# Altium PCB uMote_.PcbDoc
Units mm, origin at the board's own origin, x right, y up, seen from the top; angles counter-clockwise.
Board outline 73.42 x 46.3 mm, 2 copper layers (Top Layer, Bottom Layer); 33 components, 38 nets, 156 pads, 17 vias.
Unrouted connection lines stored in the file: 36.
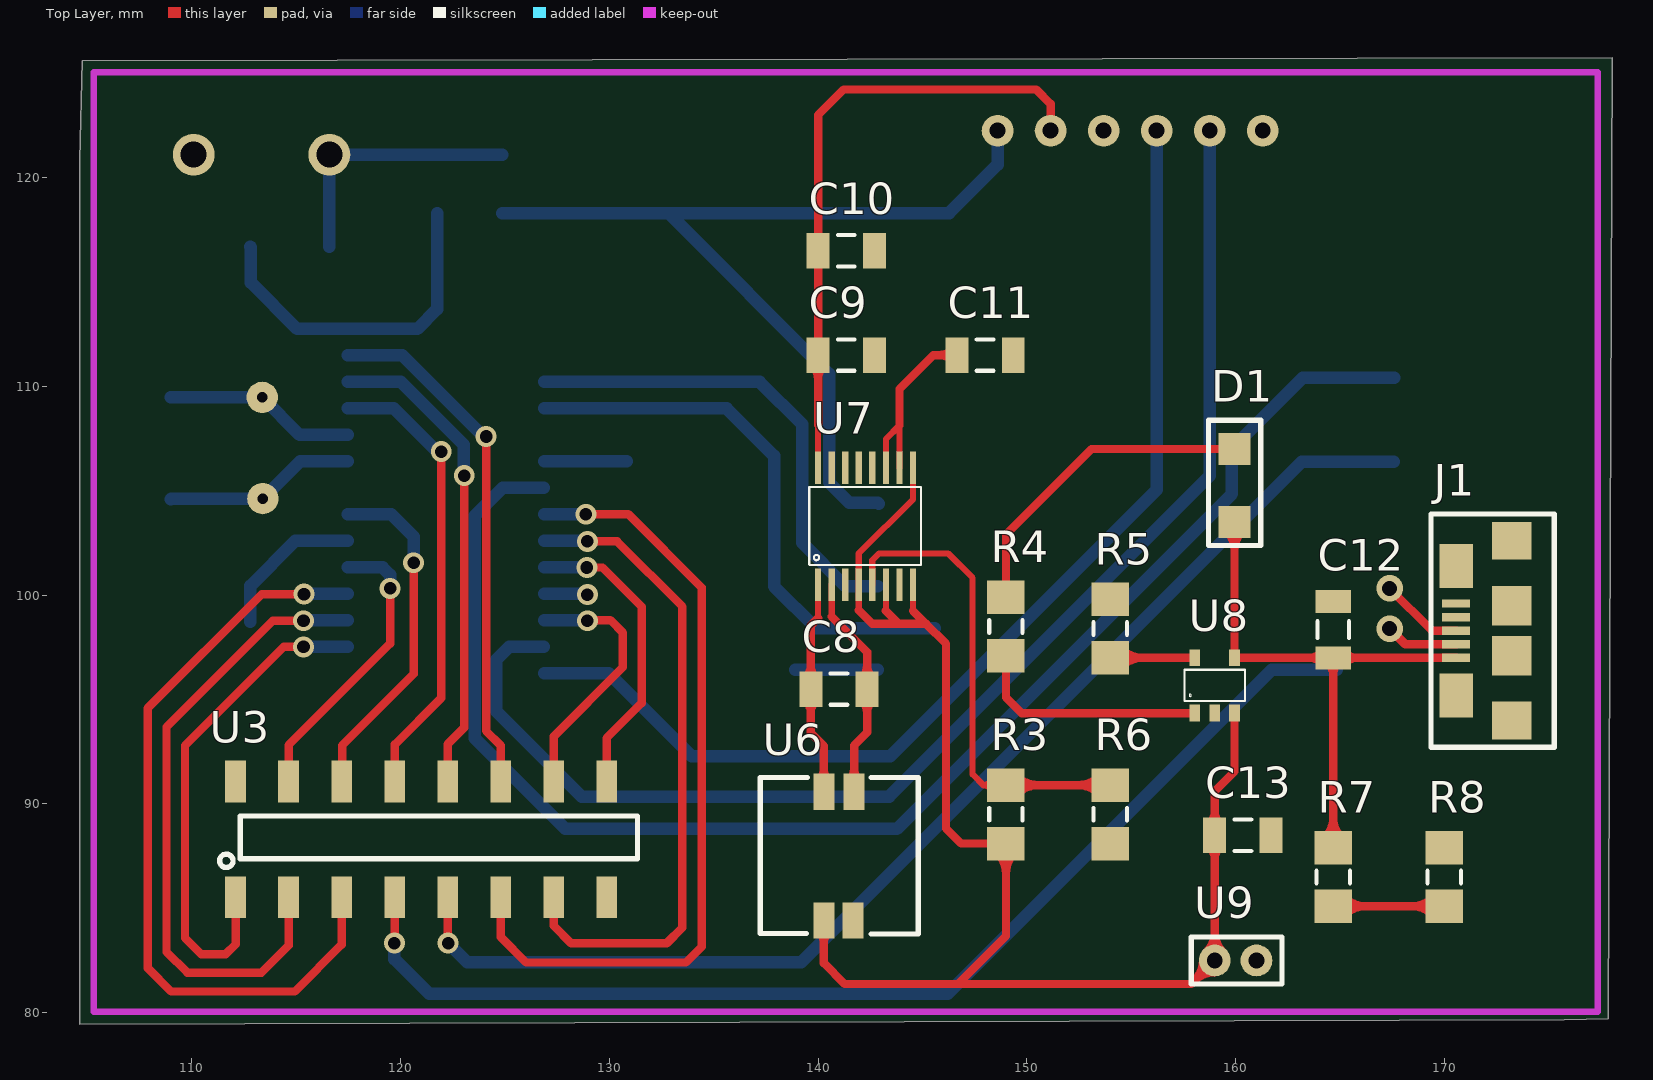
[diagram p0: Top Layer view]
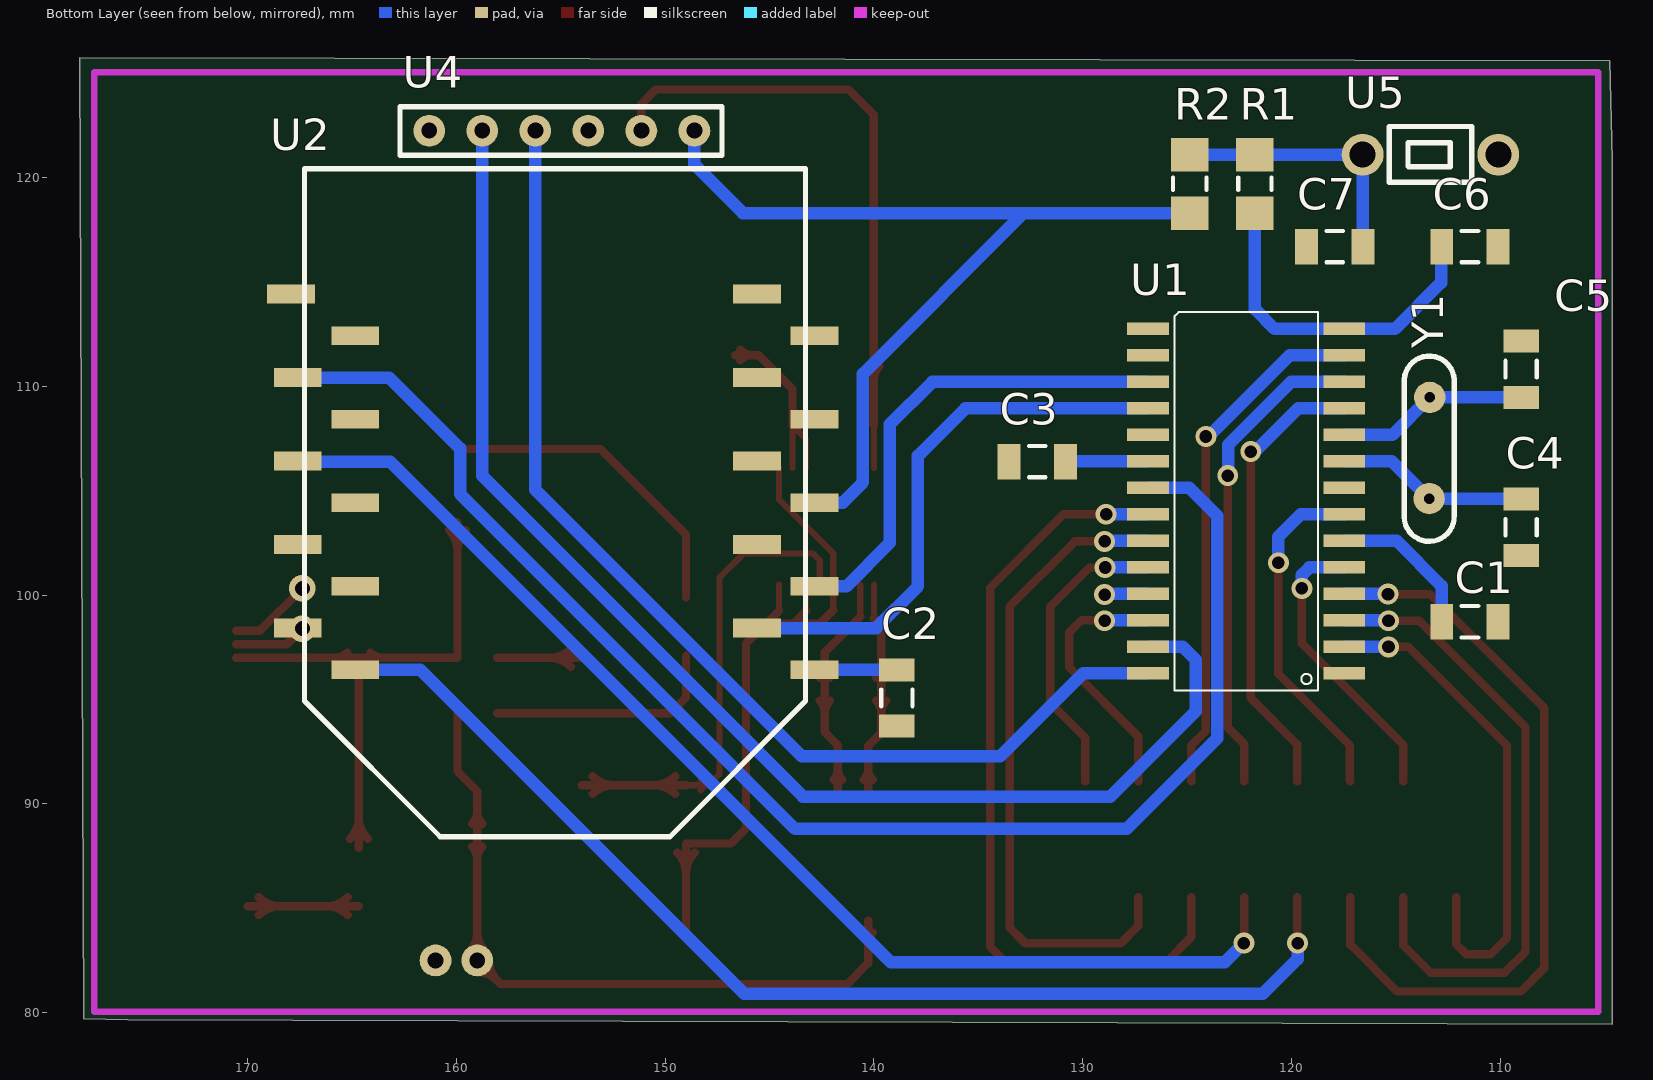
[diagram p1: Bottom Layer view, seen from below]

## Layer stack, top to bottom
Top Layer: signal copper 0.0356
Dielectric: core 0.32, FR-4, Dk 4.8
Bottom Layer: signal copper 0.0356

## Board outline
104.625,120.85 104.75,125.6 178.05,125.75 177.85,79.7 175.75,79.65 104.625,79.45

## Design rules (kind name [scope] priority, off if disabled: settings)
Clearance [All] p1: gap=0.2
PolygonConnect [All] p1: connectstyle=Relief reliefconductorwidth=0.254 reliefentries=4 polygonreliefangle="90 Angle"
RoomDefinition pic [InComponentClass('pic')] p1: confinementstyle=ConfineIn formatcopy=TRUE lockcomponents=FALSE outline 106.525,79.875 170.225,79.875 170.225,124.85 106.525,124.85
RoomDefinition power [InComponentClass('power')] p2: confinementstyle=ConfineIn formatcopy=TRUE lockcomponents=FALSE outline 135.5,80 176,80 175.877,110.754 155.849,110.754 155.824,120.475 135.5,120.399
RoutingVias [All] p1: holewidth=0.6 width=1 viastyle="Through Hole" minholewidth=0.711 minwidth=1 maxholewidth=0.711 maxwidth=1
SilkscreenOverComponentPads [All] p1: minsilkscreentomaskgap=0.254
SolderMaskExpansion [All] p1: expansion=0.102
Width [All] p1: maxlimit=0.6 minlimit=0.2 preferedwidth=0.6 toplayer_maxwidth=0.4 toplayer_prefwidth=0.4 minimp=50.000000 maximp=50.000000 favimp=50.000000
27 further rules are at their usual default settings.

## Classes and differential pairs
component class pic: C1 C2 C3 C4 C5 C6 C7 R1 R2 U1 U2 U3 U4 U5 Y1
component class power: C8 C9 C10 C11 C12 C13 D1 J1 R3 R4 R5 R6 R7 R8 U6 U7 U8 U9

## Components (designator, comment, footprint, x,y, rotation, side; value= is the part's Value field where it differs from the comment)
C1 "10uF 10V" C1206 111.45,98.725 r0 bottom
C2 "TDK" C1206 138.9,95.075 r270 bottom
C3 "0.1uF 20V" C1206 132.175,106.4 r0 bottom
C4 "22pF" C1206 109,103.25 r270 bottom
C5 "22pF" C1206 109,110.825 r90 bottom
C6 "0.1uF" C1206 111.45,116.7 r180 bottom
C7 "0.1uF 20V" C1206 117.925,116.7 r0 bottom
C8 "10uF" C1206 141,95.5 r0 top
C9 "2.2uF" C1206 141.35,111.5 r0 top
C10 "100uF" C1206 141.35,116.5 r0 top
C11 "2.2uF" C1206 148,111.5 r180 top
C12 "4.7uF" C1206 164.675,98.35 r90 top
C13 "4.7uF" C1206 160.35,88.5 r0 top
D1 "LED2" "LED SMD 1206" 159.95,103.5 r90 top
J1 "MicroUSB-B" "Micro USB Tipo B" 170.561,98.297 r90 top
R1 "15K" 3216[1206] 121.75,119.7 r90 bottom
R2 "820" 3216[1206] 124.875,119.7 r270 bottom
R3 "1.3K" 3216[1206] 149,89.5 r270 top
R4 "330" 3216[1206] 149,98.5 r270 top
R5 "2K" 3216[1206] 154,98.4 r270 top
R6 "500K" 3216[1206] 154,89.5 r90 top
R7 "56K" 3216[1206] 164.675,86.5 r90 top
R8 "100K" 3216[1206] 170,86.5 r270 top
U1 "PIC18F26J50" PIC18F-SOIC 122.175,104.505 r0 bottom
U2 "XBee PRO" "XBEE PRO SMD" 155.387,105.425 r0 bottom
U3 "14 PIN DUAL HEADER SMD" "14 PIN DUAL HEADER" 112.1,85.525 r0 top
U4 "PicKit2" PICKIT3 148.6,122.25 r0 bottom
U5 "Mini Switch" "Mini Switch" 116.59,125.6 r180 bottom
U6 "COILTRONICS DRQ74-220" DRQ-220 141,87.5 r90 top
U7 "TPS61131" TPS61131 140,100.5 r0 top
U8 "MCP73831/2" MCP73831 159,95.675 r0 top
U9 "Battery" "JST PH" 159,82.5 r0 top
Y1 "XTAL" HC-49/US 113.4,104.625 r90 bottom

## Footprints (in the part's own frame and the unit in brackets; to place one, negate y for a bottom-side part, rotate by r counter-clockwise, add the part's x,y. Pads: shape width x height; smd on the part's side, far side on the other; paste and mask are expansions set on the pad)
"14 PIN DUAL HEADER" [mm]
  rect 1x2 smd: 1(0,0) 2(2.54,0) 3(5.08,0) 4(7.62,0) 5(10.16,0) 6(12.7,0) 7(15.24,0) 8(17.775,0) 9(17.775,5.55) 10(15.24,5.55) 11(12.7,5.55) 12(10.16,5.55) 13(7.62,5.55) 14(5.08,5.55) 15(2.54,5.55) 16(0,5.55)
  silkscreen extent -0.76,1.43 19.25,3.9, body extent -1.38,0 19.5,5.53, height 2
3216[1206] [mm] "Chip Resistor; Body 3.2 x 1.6 mm (LxW typ)"
  rect 1.6x1.8 smd: 1(-1.4,0) 2(1.4,0)
  silkscreen extent -0.3,-0.8 0.3,0.8
C1206 [mm] "Chip Capacitor, Body 3.2x1.6mm, IPC High Density"
  rect 1.1x1.7 smd: 1(-1.35,0) 2(1.35,0)
  silkscreen extent -0.4,-0.75 0.4,0.75, body extent -1.7,-0.9 1.7,0.9, height 1.3
DRQ-220 [mm]
  rect 1.73x1 smd: 1(-3.085,0.725) 2(-3.085,-0.675) 3(3.085,-0.725) 4(3.085,0.725)
  silkscreen extent -3.74,-3.8 3.76,3.78, body extent -3.51,-3.65 3.54,3.58, height 4.45
HC-49/US [mm]
  round 1.5 hole 0.5: 1(0,0) 2(4.85,-0.025)
  silkscreen extent -2.05,-1.2 6.82,1.2
"JST PH" [mil]
  round 60 hole 30: 1(0,0) 2(78.74,0)
  silkscreen extent -44,-44 127,44
"LED SMD 1206" [mil]
  rect 60x60 smd: 1(0,0) 2(137.8,0)
  silkscreen extent -44,-49 192,49
MCP73831 [mm]
  rect 0.51x0.8 smd: 1(-0.95,-1.325) 2(0,-1.325) 3(0.95,-1.325) 4(0.95,1.325) 5(-0.95,1.325)
  silkscreen extent -1.45,-0.75 1.45,0.75
"Micro USB Tipo B" [mm]
  rect 0.4x1.35 smd: 1(-1.3,0) 2(-0.65,0) 3(0,0) 4(0.65,0) 5(1.3,0)
  rect 1.8x1.9 smd: 6(-4.3,-2.675) 6(4.3,-2.675)
  rect 2.1x1.6 smd: 6(-3.1,0) 6(3.1,0)
  rect 1.9x1.9 smd: 6(-1.2,-2.675) 6(1.2,-2.675)
  silkscreen extent -5.59,-4.7 5.59,1.2
"Mini Switch" [mm]
  round 2 hole 1.24: 1(6.5,-4.5) 2(0,-4.5)
  silkscreen extent 1.28,-5.82 5.23,-3.15, body extent 1.28,-5.8 5.23,-3.17, height 2
PIC18F-SOIC [mm]
  rect 2x0.6 smd: 1(-4.7,8.255) 2(-4.7,6.985) 3(-4.7,5.715) 4(-4.7,4.445) 5(-4.7,3.175) 6(-4.7,1.905) 7(-4.7,0.635) 8(-4.7,-0.635) 9(-4.7,-1.905) 10(-4.7,-3.175) 11(-4.7,-4.445) 12(-4.7,-5.715) 13(-4.7,-6.985) 14(-4.7,-8.255) 15(4.7,-8.255) 16(4.7,-6.985) 17(4.7,-5.715) 18(4.7,-4.445) 19(4.7,-3.175) 20(4.7,-1.905) 21(4.7,-0.635) 22(4.7,0.635) 23(4.7,1.905) 24(4.7,3.175) 25(4.7,4.445) 26(4.7,5.715) 27(4.7,6.985) 28(4.7,8.255)
  silkscreen extent -3.45,-9.05 3.43,9.07
PICKIT3 [mil]
  round 60 hole 30: 1(0,0) 2(100,0) 3(200,0) 4(300,0) 5(400,0) 6(500,0)
  silkscreen extent -52,-45 555,46
TPS61131 [mm]
  rect 0.3x1.55 smd: 1(0,0) 2(0.65,0) 3(1.3,0) 4(1.95,0) 5(2.6,0) 6(3.25,0) 7(3.9,0) 8(4.55,0) 9(4.55,5.6) 10(3.9,5.6) 11(3.25,5.6) 12(2.6,5.6) 13(1.95,5.6) 14(1.3,5.6) 15(0.65,5.6) 16(0,5.6)
  silkscreen extent -0.43,0.95 4.92,4.67
"XBEE PRO SMD" [mm]
  rect 2.29x0.9 smd: 1(-12.537,9) 2(-9.787,7) 3(-12.537,5) 4(-9.787,3) 5(-12.537,1) 6(-9.787,-1) 7(-12.537,-3) 8(-9.787,-5) 9(-12.537,-7) 10(-9.787,-9) 11(12.538,-9) 12(9.463,-7) 13(12.213,-5) 14(9.463,-3) 15(12.213,-1) 16(9.463,1) 17(12.213,3) 18(9.463,5) 19(12.213,7) 20(9.463,9)
  silkscreen extent -12.11,-15 11.89,17, body extent -12.12,-14.97 11.9,17, height 5

## Part data
C1 C2 C3 C4 C5 C6 C7 C8 C9 C10 C11 C12 C13: library part "TDK C3216X7R1C106K"
D1: "Typical RED, GREEN, YELLOW, AMBER GaAs LED"
R1 R2: library part "RES 1206"
R3 R4 R5 R6 R7 R8: library part "Res Semi", "Semiconductor Resistor"

## Via types
v1: diameter 1, hole 0.6, Top Layer to Bottom Layer, 15 vias
v2: diameter 1.27, hole 0.711, Top Layer to Bottom Layer, 2 vias

## Nets (pads, with @x,y where several pads share a name; then routed paths per layer and width w, separated by ;. In a path a pad name is that pad's centre, name@x,y a point inside that pad or via, vN(x,y) a via of type N, cw(c..) or ccw(c..) an arc to the next point about the centre after c; other vN are vias at no path point)
D+: J1.3 U1.16 | length 4
  Top Layer w0.4: v2(167.375,100.325) 169.403,98.297 J1.3
D-: J1.2 U1.15 | length 3.5
  Top Layer w0.4: v2(167.375,98.4) 168.128,97.647 J1.2
GND: C1.1 C2.2 C3.2 C4.2 C5.2 C6.2 C7.2 C9.2 C10.2 C11.1 C12.2 C13.2 J1.4 J1.5 R5.1 R6.1 R8.1 U1.8 U1.19 U2.10 U3.16 U4.3 U5.1 U6.2 U7.3 U7.12 U8.2 U9.2
NetC1_2: C1.2 U1.6 | length 7.3
  Bottom Layer w0.6: C1.2 112.8,100.45 114.95,102.6 U1.6
NetC4_1: C4.1 U1.9 Y1.1 | length 9.2
  Bottom Layer w0.6: C4.1 109.025,104.625 Y1.1 115.185,106.41 U1.9
NetC5_1: C5.1 U1.10 Y1.2 | length 9.2
  Bottom Layer w0.6: C5.1 Y1.2 115.17,107.68 U1.10
NetC7_1: C7.1 R1.2 R2.1 U5.2 | length 12.7
  Bottom Layer w0.6: C7.1@116.59,116.7 U5.2 R2.1
NetC8_1: C8.1 U6.4 U7.1 | length 17.9
  Top Layer w0.3: 140,98.9 U7.1
  Top Layer w0.4: 140,98.9 139.65,98.55 C8.1 139.65,93.4 140.275,92.775 U6.4 ; 139.65,94.355 ccw(c138.805,94.355) 139.403,94.953 cw(c138.805,94.355) 139.65,94.355 ; 139.65,94.355 cw(c140.495,94.355) 139.897,94.953 ccw(c140.495,94.355) 139.65,94.355 ; 139.65,96.645 ccw(c140.495,96.645) 139.897,96.047 cw(c140.495,96.645) 139.65,96.645 ; 139.65,96.645 cw(c138.805,96.645) 139.403,96.047 ccw(c138.805,96.645) 139.65,96.645 ; 140.275,91.674 ccw(c140.999,91.674) 140.487,91.162 cw(c140.999,91.674) 140.275,91.674 ; 140.275,91.674 cw(c139.551,91.674) 140.063,91.162 ccw(c139.551,91.674) 140.275,91.674
NetC8_2: C8.2 U6.3 U7.2 | length 18.5
  Top Layer w0.3: 140.65,98.975 U7.2
  Top Layer w0.4: 140.65,98.975 142.35,97.275 C8.2 142.35,93.425 141.725,92.8 U6.3 ; 141.725,91.674 ccw(c142.449,91.674) 141.937,91.162 cw(c142.449,91.674) 141.725,91.674 ; 141.725,91.674 cw(c141.001,91.674) 141.513,91.162 ccw(c141.001,91.674) 141.725,91.674 ; 142.35,94.355 ccw(c141.505,94.355) 142.103,94.953 cw(c141.505,94.355) 142.35,94.355 ; 142.35,94.355 cw(c143.195,94.355) 142.597,94.953 ccw(c143.195,94.355) 142.35,94.355 ; 142.35,96.645 ccw(c143.195,96.645) 142.597,96.047 cw(c143.195,96.645) 142.35,96.645 ; 142.35,96.645 cw(c141.505,96.645) 142.103,96.047 ccw(c141.505,96.645) 142.35,96.645
NetD1_2: D1.2 R4.1 | length 15.6
  Top Layer w0.4: R4.1 149,102.9 153.1,107 D1.2
NetR3_1: R3.1 R6.2 U7.5 | length 32.9
  Top Layer w0.3: U7.5 142.6,101.675 142.925,102 146.225,102 147.4,100.825 147.4,91.425 147.925,90.9 ; R3.1@148.3,90.65 ccw(c147.925,90.494) 147.925,90.9 ; R3.1@148.3,91.15 cw(c147.925,91.306) 147.925,90.9 ; R3.1 147.925,90.9
  Top Layer w0.4: R3.1 R6.2 ; 150.549,90.9 ccw(c150.549,89.451) 149.524,90.476 cw(c150.549,89.451) 150.549,90.9 ; 150.549,90.9 cw(c150.549,92.349) 149.524,91.324 ccw(c150.549,92.349) 150.549,90.9 ; 152.451,90.9 ccw(c152.451,92.349) 153.476,91.324 cw(c152.451,92.349) 152.451,90.9 ; 152.451,90.9 cw(c152.451,89.451) 153.476,90.476 ccw(c152.451,89.451) 152.451,90.9
NetR4_2: R4.2 U8.1 | length 11.4
  Top Layer w0.4: R4.2 149,95.1 149.75,94.35 U8.1
NetR5_2: R5.2 U8.5 | length 8.6
  Top Layer w0.4: R5.2 U8.5 ; 155.549,97 ccw(c155.549,95.551) 154.524,96.576 cw(c155.549,95.551) 155.549,97 ; 155.549,97 cw(c155.549,98.449) 154.524,97.424 ccw(c155.549,98.449) 155.549,97
NetU1_2: U1.2 U3.1 | length 24.2
  Top Layer w0.4: U3.1 112.1,84.306 112.1,83.275 111.625,82.8 110.45,82.8 109.675,83.575 109.675,92.8 114.4,97.525 v1(115.35,97.525)
  Bottom Layer w0.6: v1@115.355,97.52 U1.2
NetU1_3: U1.3 U3.2 | length 30.7
  Top Layer w0.4: U3.2 114.64,83.215 113.341,81.916 109.784,81.916 108.791,82.909 108.791,93.684 113.882,98.775 v1(115.35,98.775)
  Bottom Layer w0.6: v1@115.365,98.79 U1.3
NetU1_4: U1.4 U3.3 | length 37.2
  Top Layer w0.4: v1(115.375,100.05) 113.354,100.05 107.89,94.585 107.89,82.135 109.01,81.015 114.94,81.015 117.18,83.255 U3.3
  Bottom Layer w0.6: v1@115.385,100.06 U1.4
NetU1_5: U1.5 U3.15 | length 14.1
  Top Layer w0.4: U3.15 114.64,92.815 119.5,97.675 v1(119.5,100.325)
  Bottom Layer w0.6: U1.5 119.145,101.33 119.5,100.975 v1(119.5,100.325)
NetU1_7: U1.7 U3.14 | length 16.7
  Top Layer w0.4: U3.14 117.2,91.095 117.2,92.8 120.625,96.225 v1(120.625,101.55)
  Bottom Layer w0.6: U1.7 119.555,103.87 120.625,102.8 v1(120.625,101.55)
NetU1_11: U1.11 U3.13 | length 22.1
  Top Layer w0.4: U3.13@119.725,91.08 119.725,92.85 121.95,95.075 v1(121.95,106.875)
  Bottom Layer w0.6: U1.11 119.675,108.95 121.75,106.875 v1(121.95,106.875)
NetU1_12: U1.12 U3.12 | length 23.3
  Top Layer w0.4: U3.12 122.26,92.86 123.05,93.65 v1(123.05,105.725)
  Bottom Layer w0.6: U1.12 120.019,110.22 123.025,107.214 123.025,105.75 v1(123.05,105.725)
NetU1_13: U1.13 U3.11 | length 25.1
  Top Layer w0.4: v1(124.1,107.6) 124.1,93.5 124.8,92.8 U3.11
  Bottom Layer w0.6: U1.13 120.085,111.49 123.975,107.6 v1(124.1,107.6)
NetU1_17: U1.17 U2.3 | length 23.4
  Bottom Layer w0.6: U1.17 128.92,110.22 137.205,110.22 139.25,108.175 139.25,102.5 141.325,100.425 U2.3
NetU1_18: U1.18 U2.2 | length 26.7
  Bottom Layer w0.6: U1.18 135.625,108.95 137.9,106.675 137.9,100.425 139.9,98.425 U2.2
NetU1_21: U1.21 U2.13 | length 70.6
  Bottom Layer w0.6: U1.21@126.865,105.15 124.9,105.15 123.55,103.8 123.55,93.15 127.9,88.8 143.775,88.8 159.825,104.85 159.825,107.025 163.225,110.425 U2.13
NetU1_22: U1.22 U3.6 | length 38.5
  Top Layer w0.4: U3.6 124.8,83.625 126.019,82.406 133.669,82.406 134.419,83.156 134.419,100.369 130.913,103.875 v1(128.875,103.875)
  Bottom Layer w0.6: U1.22 v1@128.87,103.87
NetU1_23: U1.23 U3.7 | length 31.5
  Top Layer w0.4: U3.7 127.34,84.16 128.175,83.325 132.75,83.325 133.5,84.075 133.5,99.45 130.375,102.575 v1(128.95,102.575)
  Bottom Layer w0.6: U1.23 v1@128.925,102.6
NetU1_24: U1.24 U3.9 | length 14.5
  Top Layer w0.4: v1(128.925,101.325) 129.675,101.325 131.55,99.45 131.55,94.825 129.875,93.15 U3.9
  Bottom Layer w0.6: U1.24 v1@128.92,101.33
NetU1_26: U1.26 U3.10 | length 12.5
  Top Layer w0.4: U3.10 127.34,93.24 130.65,96.55 130.65,98.2 130.05,98.8 v1@128.975,98.8
  Bottom Layer w0.6: U1.26 128.935,98.79 v1(128.95,98.775)
NetU1_27: U1.27 U4.5 | length 63.8
  Bottom Layer w0.6: U1.27@126.87,97.525 125.2,97.525 124.575,96.9 124.575,94.45 128.675,90.35 143.4,90.35 158.76,105.71 U4.5
NetU1_28: U1.28 U4.4 | length 53.5
  Bottom Layer w0.6: U1.28 129.975,96.25 133.95,92.275 143.45,92.275 156.22,105.045 U4.4
NetU2_15: U2.15 U3.5 | length 57.8
  Top Layer w0.4: v1@122.26,83.35 U3.5
  Bottom Layer w0.6: v1(122.28,83.33) 123.185,82.425 139.2,82.425 163.175,106.4 U2.15@167.575,106.4
NetU2_20: U2.20 U3.4 | length 55.2
  Top Layer w0.4: v1@119.72,83.345 U3.4
  Bottom Layer w0.6: v1(119.705,83.33) 119.705,82.57 121.375,80.9 146.2,80.9 161.725,96.425 U2.20
RESET: R2.2 U1.1 U2.5 U4.1 | length 45.2
  Bottom Layer w0.6: R2.2 132.825,118.3 ; U2.5@142.9,104.375 U2.5 141.5,104.425 140.525,105.4 140.525,110.6 132.825,118.3 ; U4.1 148.6,120.625 146.275,118.3 132.825,118.3
USB_ATTACH: R7.1 R8.2 U1.25 | length 16.5
  Top Layer w0.4: R7.1 R8.2 ; 166.224,85.1 cw(c166.224,86.549) 165.199,85.524 ccw(c166.224,86.549) 166.224,85.1 ; 166.224,85.1 ccw(c166.224,83.651) 165.199,84.676 cw(c166.224,83.651) 166.224,85.1 ; 168.451,85.1 ccw(c168.451,86.549) 169.476,85.524 cw(c168.451,86.549) 168.451,85.1 ; 168.451,85.1 cw(c168.451,83.651) 169.476,84.676 ccw(c168.451,83.651) 168.451,85.1
  Bottom Layer w0.6: U1.25 v1@128.915,100.06
  other v1: 128.95,100.025
VBAT: C13.1 R3.2 U6.1 U7.4 U7.6 U7.7 U7.8 U7.9 U8.3 U9.1 | length 91.3
  Top Layer w0.3: 141.95,99.275 U7.4 141.95,102 144.55,104.6 U7.9 ; 143.25,99.25 U7.6 ; 144.55,99.25 U7.8
  Top Layer w0.4: U6.1 140.275,82.375 141.275,81.375 146.7,81.375 ; 141.95,99.275 142.6,98.625 143.875,98.625 ; 143.25,99.25 143.875,98.625 ; 144.55,99.25 145.175,98.625 ; U8.3 159.95,91.55 159,90.6 C13.1 U9.1 157.875,81.375 146.7,81.375 ; 140.275,83.326 ccw(c139.551,83.326) 140.063,83.838 cw(c139.551,83.326) 140.275,83.326 ; 140.275,83.326 cw(c140.999,83.326) 140.487,83.838 ccw(c140.999,83.326) 140.275,83.326 ; 143.875,98.625 145.175,98.625 ; 145.175,98.625 146.125,97.675 146.125,88.825 146.85,88.1 R3.2 149,83.675 146.7,81.375 ; 149,86.651 ccw(c147.551,86.651) 148.576,87.676 cw(c147.551,86.651) 149,86.651 ; 149,86.651 cw(c150.449,86.651) 149.424,87.676 ccw(c150.449,86.651) 149,86.651 ; 158.041,81.541 ccw(c157.081,82.5) 158.438,82.5 cw(c157.081,82.5) 158.041,81.541 ; 158.041,81.541 cw(c159,80.581) 159,81.938 ccw(c159,80.581) 158.041,81.541 ; 159,83.857 ccw(c160.357,83.857) 159.397,82.897 cw(c160.357,83.857) 159,83.857 ; 159,83.857 cw(c157.643,83.857) 158.603,82.897 ccw(c157.643,83.857) 159,83.857 ; 159,87.355 ccw(c158.155,87.355) 158.753,87.953 cw(c158.155,87.355) 159,87.355 ; 159,87.355 cw(c159.845,87.355) 159.247,87.953 ccw(c159.845,87.355) 159,87.355 ; 159,89.645 ccw(c159.845,89.645) 159.247,89.047 cw(c159.845,89.645) 159,89.645 ; 159,89.645 cw(c158.155,89.645) 158.753,89.047 ccw(c158.155,89.645) 159,89.645
VCC: C2.1 C3.1 C6.1 C9.1 C10.1 R1.1 U1.14 U1.20 U2.1 U3.8 U4.2 U7.16 | length 57.2
  Top Layer w0.3: U7.16 140,108.15
  Top Layer w0.4: 140,108.15 C9.1 C10.1 140,123 141.225,124.225 150.45,124.225 151.14,123.535 U4.2 ; 140,110.355 ccw(c139.155,110.355) 139.753,110.953 cw(c139.155,110.355) 140,110.355 ; 140,110.355 cw(c140.845,110.355) 140.247,110.953 ccw(c140.845,110.355) 140,110.355
  Bottom Layer w0.6: C6.1 112.825,116.675 112.825,114.975 115.04,112.76 U1.14 120.81,112.76 121.75,113.7 R1.1 ; U1.20 126.89,106.425 C3.1@130.825,106.425 ; C2.1 U2.1
VCCAUX: C11.2 U7.10 U7.11 | length 12.1
  Top Layer w0.3: U7.11 143.25,107.475 143.9,108.125 U7.10
  Top Layer w0.4: 143.9,108.125 143.9,109.875 145.525,111.5 C11.2 ; 145.805,111.5 ccw(c145.805,112.345) 146.403,111.747 cw(c145.805,112.345) 145.805,111.5 ; 145.805,111.5 cw(c145.805,110.655) 146.403,111.253 ccw(c145.805,110.655) 145.805,111.5
VUSB: C12.1 D1.1 J1.1 R7.2 U8.4 | length 43
  Top Layer w0.4: D1.1 U8.4 C12.1 R7.2 ; C12.1@164.678,96.997 J1.1 ; 159.95,102.143 ccw(c158.593,102.143) 159.553,103.103 cw(c158.593,102.143) 159.95,102.143 ; 159.95,102.143 cw(c161.307,102.143) 160.347,103.103 ccw(c161.307,102.143) 159.95,102.143 ; 163.53,97 ccw(c163.53,97.845) 164.128,97.247 cw(c163.53,97.845) 163.53,97 ; 163.53,97 cw(c163.53,96.155) 164.128,96.753 ccw(c163.53,96.155) 163.53,97 ; 164.675,89.349 ccw(c166.124,89.349) 165.099,88.324 cw(c166.124,89.349) 164.675,89.349 ; 164.675,89.349 cw(c163.226,89.349) 164.251,88.324 ccw(c163.226,89.349) 164.675,89.349 ; 164.675,96.155 ccw(c163.83,96.155) 164.428,96.753 cw(c163.83,96.155) 164.675,96.155 ; 164.675,96.155 cw(c165.52,96.155) 164.922,96.753 ccw(c165.52,96.155) 164.675,96.155 ; C12.1@165.222,96.753 cw(c165.813,96.162) 165.813,96.997 ccw(c165.813,96.162) C12.1@165.222,96.753 ; C12.1@165.222,97.247 ccw(c165.827,97.852) 165.827,96.997 cw(c165.827,97.852) C12.1@165.222,97.247
pads on no net: J1.6 U2.4 U2.6 U2.7 U2.8 U2.9 U2.11 U2.12 U2.14 U2.16 U2.17 U2.18 U2.19 U4.6 U7.13 U7.14 U7.15

## Keep-outs
Keep-Out Layer:
  lines w0.3: 105.3,80.05 177.35,80.05 177.35,125.05 105.3,125.05 105.3,80.05

## Silkscreen, mask and mechanical layers (free items; w line width, h text height)
Drill Drawing:
  text ".LEGEND" at 24.612,87.972 h1.52
  text "Drill Drawing." at 24.612,85.432 h1.52

## Dimensions
105.3,80.05 to 177.35,80.05 on Mechanical 1
105.3,80.05 to 105.3,125.05 on Mechanical 1